# Altium PCB bug4.PcbDoc
Units mil, origin at the board's own origin, x right, y up, seen from the top; angles counter-clockwise.
Board outline 2629.47 x 1866.47 mil, 4 copper layers (Top Layer, Mid-Layer 1, Mid-Layer 2, Bottom Layer); 101 components, 84 nets, 360 pads, 226 vias.
Unrouted connection lines stored in the file: 71.
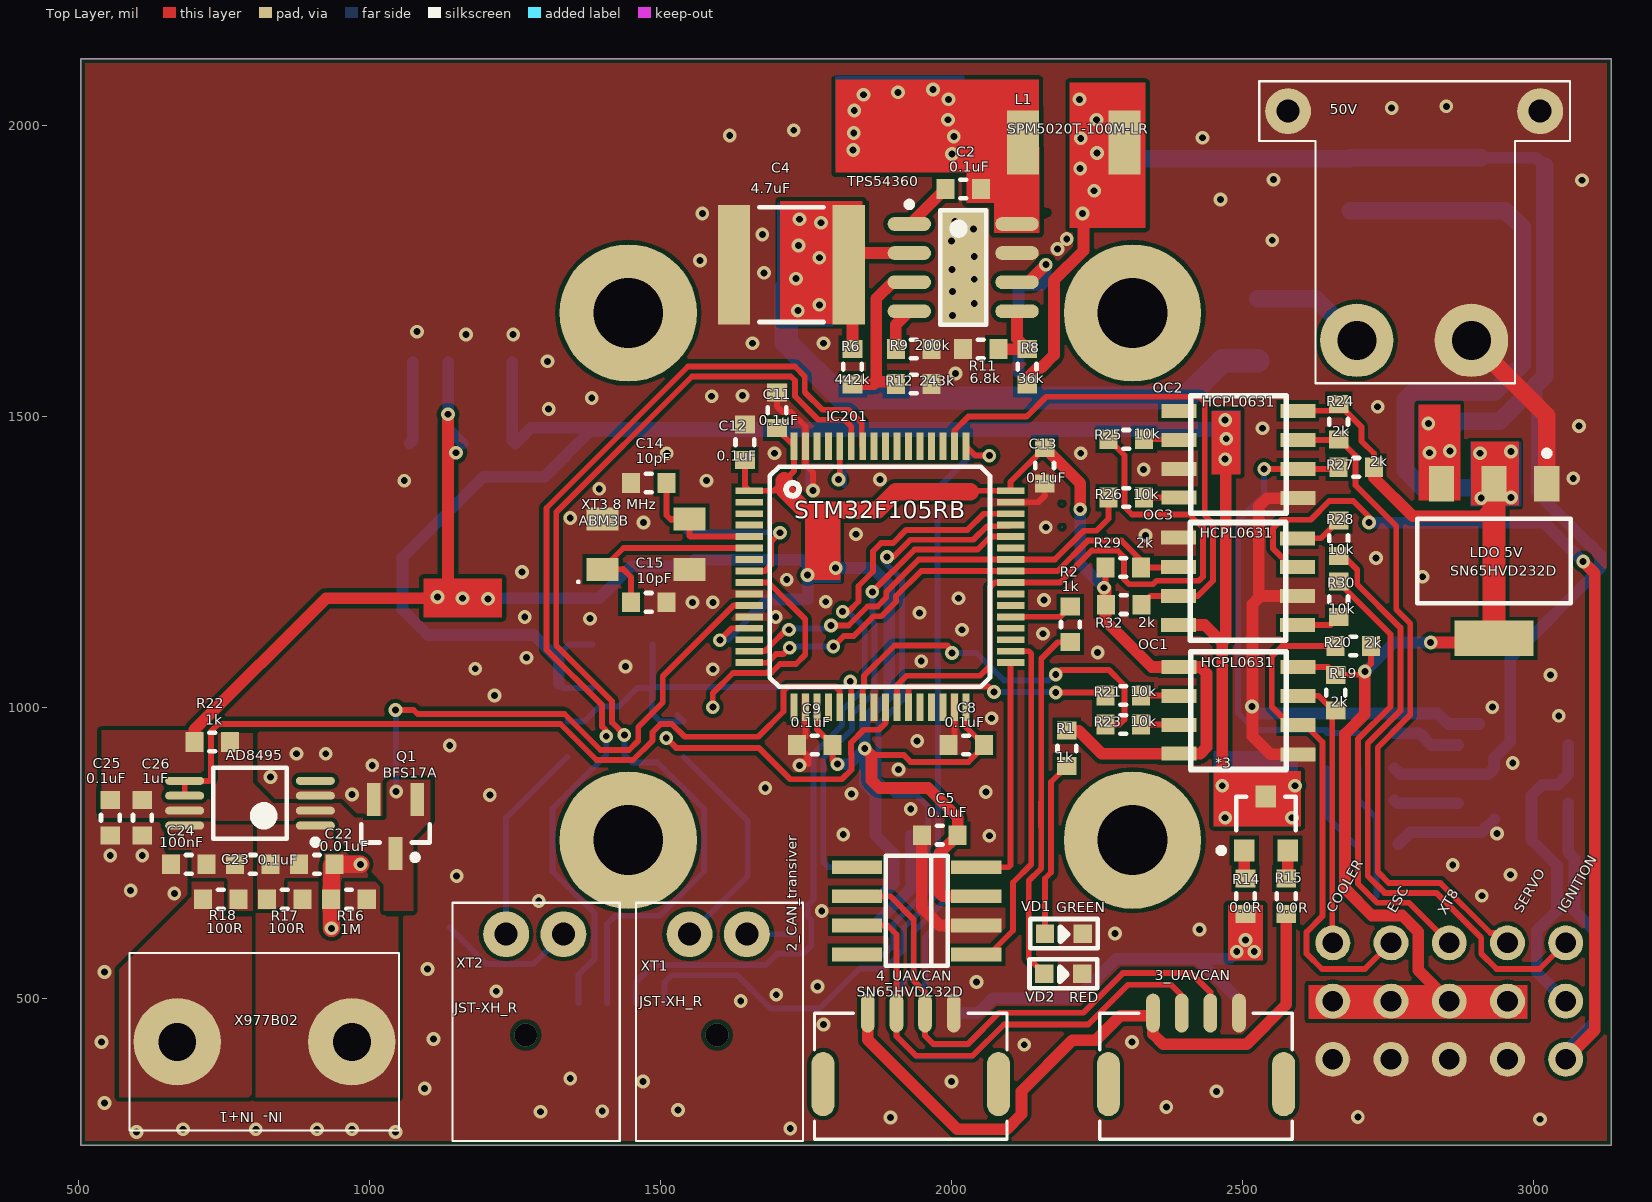
[diagram p0: Top Layer view]
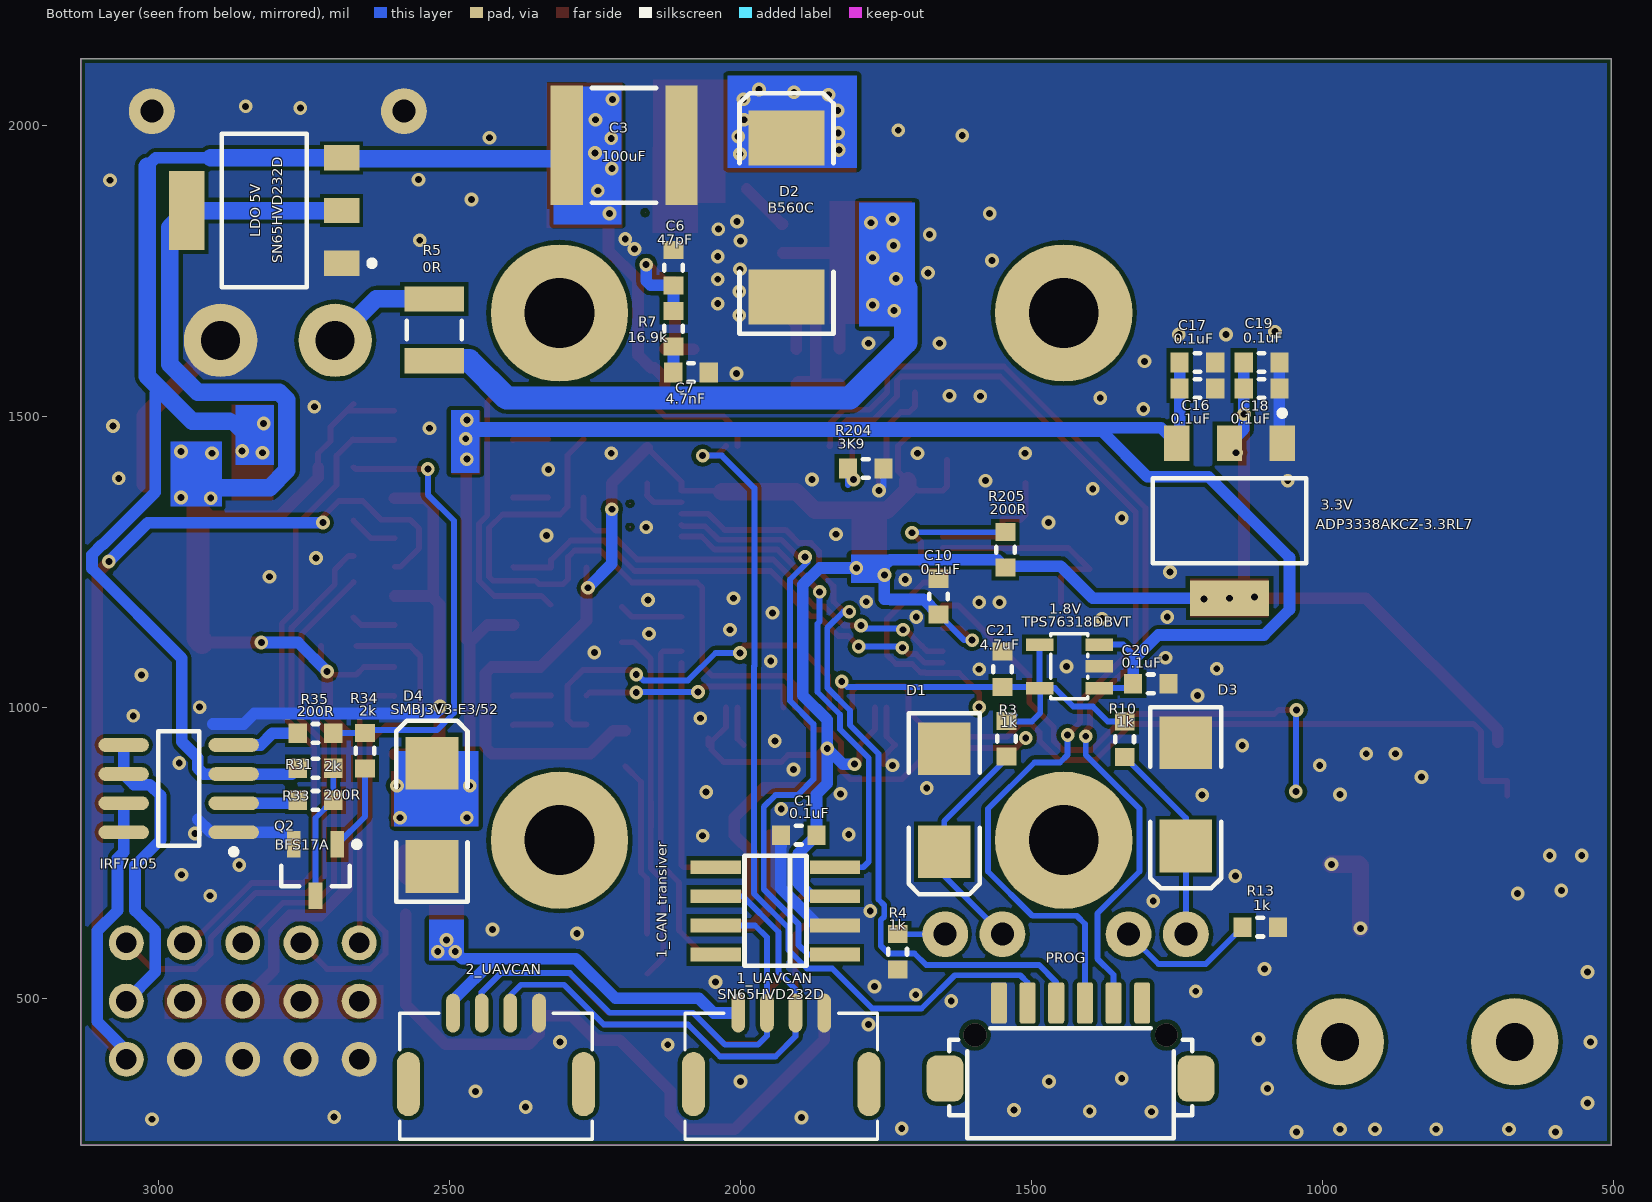
[diagram p1: Bottom Layer view, seen from below]
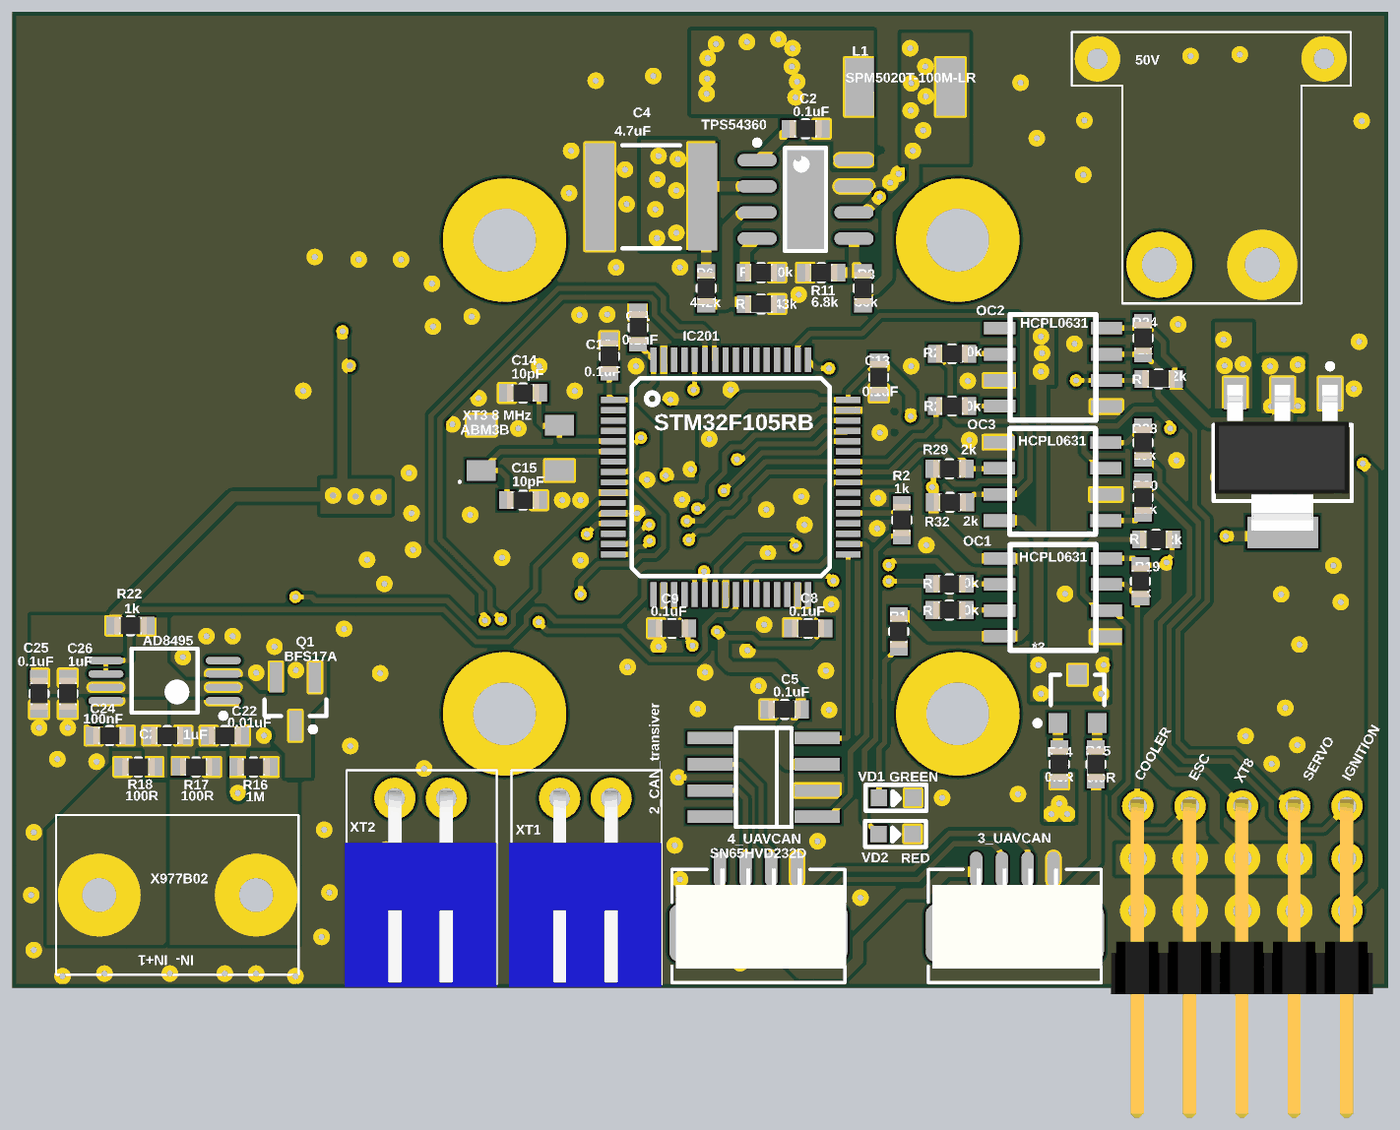
[diagram p2: 3D render of the assembled board from above, using the file's embedded part models]
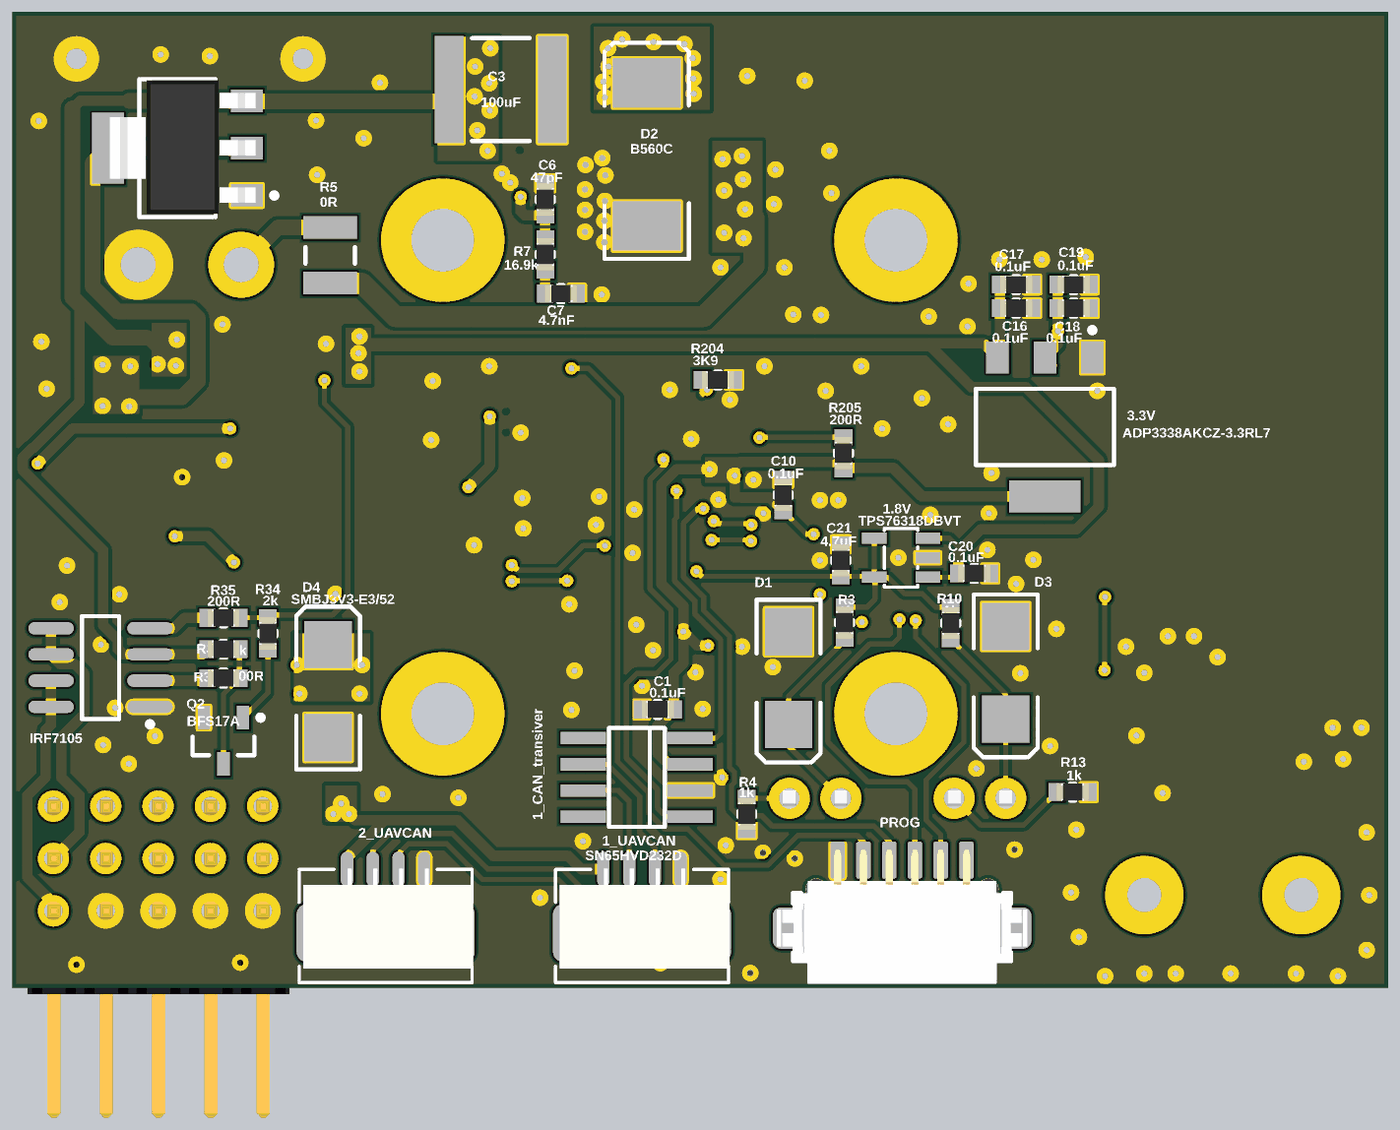
[diagram p3: 3D render of the assembled board from below, using the file's embedded part models]

## Layer stack, top to bottom
Top Solder: solder mask 0.4, Solder Resist, Dk 3.5
Top Layer: signal copper 1.4
Dielectric 1: dielectric 12.6, FR-4, Dk 4.8
Mid-Layer 1: signal copper 1.4
Dielectric2: dielectric 12.6, FR-4, Dk 4.8
Mid-Layer 2: signal copper 1.4
Dielectric3: dielectric 12.6, FR-4, Dk 4.8
Bottom Layer: signal copper 1.4
Bottom Solder: solder mask 0.4, Solder Resist, Dk 3.5

## Board outline
504.01,247.74 504.01,2114.21 3133.48,2114.21 3133.49,247.74

## Design rules (kind name [scope] priority, off if disabled: settings)
Clearance [All] p1: gap=7 ignorepadtopadclearanceinfootprint=FALSE
PlaneConnect [All] p1: planeconnectstyle=Direct reliefexpansion=20 reliefentries=4 reliefconductorwidth=10 reliefairgap=10
PolygonConnect [All] p1: connectstyle=Direct reliefconductorwidth=10 reliefentries=4 polygonreliefangle="90 Angle" airgapwidth=10
RoutingVias [All] p1: holewidth=28 width=50 viastyle="Through Hole" minholewidth=28 minwidth=50 maxholewidth=28 maxwidth=50
SMDToPlane [All] p1: distance=0
SolderMaskExpansion [All] p1: expansion=4
Width [All] p1: maxlimit=100 minlimit=10 preferedwidth=20
29 further rules are at their usual default settings.

## Components (designator, comment, footprint, x,y, rotation, side; value= is the part's Value field where it differs from the comment)
1.8V "TPS76318DBVT" SOT23-5L 1435,1070.22 r90 bottom
1_CAN_transiver "SN65HVD232D" SOIC8 1940,650.22 r0 bottom
1_UAVCAN "CON-4P-RA" JST_GH-4P-RA 1930,360.22 r0 bottom
2_CAN_transiver "SN65HVD232D" SOIC8 1940,650.22 r180 top
2_UAVCAN "CON-4P-RA" JST_GH-4P-RA 2420,360.22 r0 bottom
3.3V "ADP3338AKCZ-3.3RL7" ZZ311 1160,1320.22 r0 bottom
3_UAVCAN "CON-4P-RA" JST_GH-4P-RA 2420,360.22 r180 top
4_UAVCAN "CON-4P-RA" JST_GH-4P-RA 1930,360.22 r180 top
50V "Header 4" "HEADER 2 PW" 2696.15,1630.22 r0 top
*3 "BAT60A" sot-23 2540,800.22 r0 top
AD8495 "AD8495" PW008_N 795,835.22 r180 top
C1 "0.1uF" SMT0603/VISHAY 1900,780.22 r180 bottom value=100nF
C2 "0.1uF" SMT0603/VISHAY 2020,1890.22 r0 top value=100nF
C3 "100uF" 2220 2200,1965.22 r0 bottom value="47uF 25V"
C4 "2220" 2220 1725,1760.22 r0 top value="4.7uF 100v"
C5 "0.1uF" SMT0603/VISHAY 1980,780.22 r180 top value=100nF
C6 "47pF" SMT0603/VISHAY 2115,1755.22 r90 bottom value=100nF
C7 "4.7nF" SMT0603/VISHAY 2085,1575.22 r180 bottom value=100nF
C8 "0.1uF" SMT0603/VISHAY 2025,935.22 r0 top value=100nF
C9 "0.1uF" SMT0603/VISHAY 1765,935.22 r0 top value=100nF
C10 "0.1uF" SMT0603/VISHAY 1660,1190.22 r270 bottom value=100nF
C11 "0.1uF" SMT0603/VISHAY 1700,1510.22 r270 top value=100nF
C12 "0.1uF" SMT0603/VISHAY 1645,1455.22 r270 top value=100nF
C13 "0.1uF" SMT0603/VISHAY 2160,1415.22 r90 top value=100nF
C14 "10pF" SMT0603/VISHAY 1480,1385.22 r0 top value=100nF
C15 "10pF" SMT0603/VISHAY 1480,1180.22 r180 top value=100nF
C16 "0.1uF" SMT0603/VISHAY 1215,1547.35 r0 bottom value=100nF
C17 "0.1uF" SMT0603/VISHAY 1215,1592.35 r0 bottom value=100nF
C18 "0.1uF" SMT0603/VISHAY 1105,1547.35 r0 bottom value=100nF
C19 "0.1uF" SMT0603/VISHAY 1105,1592.35 r0 bottom value=100nF
C20 "0.1uF" SMT0603/VISHAY 1295,1040.22 r180 bottom value=100nF
C21 "4.7uF" SMT0603/VISHAY 1550,1065.22 r270 bottom value=100nF
C22 "0.01uF" SMT0603/VISHAY 910,730.22 r180 top value=100nF
C23 "0.1uF" SMT0603/VISHAY 800,730.22 r180 top value=100nF
C24 "100nF" SMT0603/VISHAY 690,730.22 r180 top
C25 "0.1uF" SMT0603/VISHAY 555,810.22 r270 top value=100nF
C26 "1uF" SMT0603/VISHAY 610,810.22 r270 top value=100nF
COOLER "PLT-3" PCBComponent_1 2655,595.22 r270 top
D1 "stb.3.3" SMB 1650,840.22 r270 bottom
D2 "B560C" SMC 1921,1841.22 r90 bottom
D3 "stb.3.3" SMB 1235,850.22 r270 bottom
D4 "SMBJ3V3-E3/52" SMB 2530,815.22 r90 bottom
ESC "PLT-3" PCBComponent_1 2755,595.22 r270 top
IC201 "STM32F105RB" TQFP64-10X10 1877,1224.22 r0 top
IGNITION "PLT-3" PCBComponent_1 3055,595.22 r270 top
"IN-  IN+1" "X977B02" X977B02 820,425.22 r0 top
IRF7105 "IRF7105" SO-8_N 2965,860.22 r0 bottom
L1 "SPM5020T-100M-LR" Inductor 2210,1970.22 r0 top
"LDO 5V" "SN65HVD232D" ZZ311 2818,1853.22 r90 bottom (schematic designator 5V_2)
"LDO 5V" "SN65HVD232D" ZZ311 2932,1251.22 r180 top (schematic designator 5V_1)
OC1 "HCPL0631" UCC37322P 2575,1095.22 r270 top
OC2 "HCPL0631" UCC37322P 2575,1535.22 r270 top
OC3 "HCPL0631" UCC37322P 2410,1115.22 r90 top
PROG "CONN HEADER SH 6POS SIDE 1MM TIN" "HIROSE DF13-6P-1.25H" 1433,358.22 r0 bottom
Q1 "BFS17A" SOT23_M 1045,795.22 r270 top
Q2 "BFS17A" SOT-23_N 2730,720.22 r270 bottom
R1 "1k" SMT0603/VISHAY 2198,929.22 r90 top
R2 "1k" SMT0603/VISHAY 2204,1142.22 r90 top
R3 "1k" SMT0603/VISHAY 1543,946.22 r270 bottom
R4 "1k" SMT0603/VISHAY 1730,580.22 r270 bottom
R5 "0R" 14-1210 2526,1648.22 r90 bottom
R6 "442k" SMT0603/VISHAY 1830,1585.22 r90 top
R7 "16.9k" SMT0603/VISHAY 2115,1650.22 r90 bottom
R8 "36k" SMT0603/VISHAY 2130,1585.22 r270 top
R9 "200k" SMT0603/VISHAY 1935,1615.22 r0 top
R10 "1k" SMT0603/VISHAY 1340,945.22 r270 bottom
R11 "6.8k" SMT0603/VISHAY 2050,1615.22 r0 top
R12 "243k" SMT0603/VISHAY 1935,1555.22 r180 top
R13 "1k" SMT0603/VISHAY 1107,622.22 r180 bottom
R14 "0.0R" SMT0603/VISHAY 2505,675.22 r90 top value=3K9
R15 "0.0R" SMT0603/VISHAY 2575,675.22 r90 top value=3K9
R16 "1M" SMT0603/VISHAY 965,670.22 r0 top
R17 "100R" SMT0603/VISHAY 855,670.22 r180 top
R18 "100R" SMT0603/VISHAY 745,670.22 r0 top
R19 "2k" SMT0603/VISHAY 2660,1025.22 r90 top value=2kR
R20 "2k" SMT0603/VISHAY 2690,1105.22 r0 top value=2kR
R21 "10k" SMT0603/VISHAY 2295,1020.22 r0 top
R22 "1k" SMT0603/VISHAY 730,940.22 r180 top
R23 "10k" SMT0603/VISHAY 2295,970.22 r0 top
R24 "2k" SMT0603/VISHAY 2665,1490.22 r90 top value=2kR
R25 "10k" SMT0603/VISHAY 2300,1460.22 r0 top
R26 "10k" SMT0603/VISHAY 2300,1360.22 r0 top
R27 "2k" SMT0603/VISHAY 2695,1412.22 r0 top value=2kR
R28 "10k" SMT0603/VISHAY 2665,1290.22 r270 top
R29 "2k" SMT0603/VISHAY 2295,1240.22 r0 top value=2kR
R30 "10k" SMT0603/VISHAY 2665,1185.22 r90 top
R31 "2k" SMT0603/VISHAY 2730,895.22 r0 bottom value=2kR
R32 "2k" SMT0603/VISHAY 2296,1176.22 r0 top value=2kR
R33 "200R" SMT0603/VISHAY 2730,840.22 r180 bottom
R34 "2k" SMT0603/VISHAY 2645,925.22 r270 bottom value=2kR
R35 "200R" SMT0603/VISHAY 2730,955.22 r180 bottom
R204 "3K9" SMT0603/VISHAY 1785,1410.22 r0 bottom
R205 "200R" SMT0603/VISHAY 1545,1270.22 r270 bottom
SERVO "PLT-3" PCBComponent_1 2955,595.22 r270 top
TPS54360 "=Device" D8_L_G 2020,1755.22 r0 top
VD1 "GREEN" 1.6x0.8SMTLED/KINGBRIGHT 2193,611.22 r0 top
VD2 "RED" 1.6x0.8SMTLED/KINGBRIGHT 2192,542.22 r0 top
XT1 "JST-XH_R" JST-XH-2R 1550,610.22 r0 top
XT2 "JST-XH_R" JST-XH-2R 1235,610.22 r0 top
"XT3 8 MHz" "ABM3B" DFN220P320X110-4N 1475,1280.22 r0 top value="8 MHz" (schematic designator XT3)
XT8 "PLT-3" PCBComponent_1 2855,595.22 r270 top

## Footprints (in the part's own frame and the unit in brackets; to place one, negate y for a bottom-side part, rotate by r counter-clockwise, add the part's x,y. Pads: shape width x height; smd on the part's side, far side on the other; paste and mask are expansions set on the pad)
1.6x0.8SMTLED/KINGBRIGHT [mm]
  rect 0.8x0.8 smd: 1(-0.825,0) 2(0.825,0)
  silkscreen extent -1.47,-0.64 1.47,0.64, body extent -0.8,-0.4 0.8,0.4, height 0.7
14-1210 [mm] "Chip Resistor, Body 3.2x2.5mm, IPC High Density"
  rect 1.1x2.6 smd: 1(-1.35,0) 2(1.35,0)
  silkscreen extent -0.4,-1.2 0.4,1.2, body extent -1.68,-1.32 1.67,1.32, height 0.9
2220 [mm] "Chip Capacitor, Body 5.7x5.0mm, IPC High Density"
  rect 1.4x5.2 smd: 1(-2.5,0) 2(2.5,0)
  silkscreen extent -1.4,-2.5 1.4,2.5, body extent -2.95,-2.63 2.95,2.63, height 1.4
D8_L_G [mm] "SOIC, 8-Leads, Body 4.9x3.9mm, Pitch 1.27mm, IPC High Density"
  oval 1.9x0.6 smd: 1(-2.35,1.905) 2(-2.35,0.635) 3(-2.35,-0.635) 4(-2.35,-1.905) 5(2.35,-1.905) 6(2.35,-0.635) 7(2.35,0.635) 8(2.35,1.905)
  rect 1.9x5 smd: 9(0,0)
  silkscreen extent -2.47,-2.5 1,2.88, body extent -2,-2.5 2,2.5, height 1.75
DFN220P320X110-4N [mm] "DFN, 4-Leads, Body 5.00x3.20mm, Pitch 2.20mm, IPC Medium Density"
  rect 1.4x1 smd: 1(-1.9,-1.1) 3(1.9,1.1) G(-1.9,1.1) G(1.9,-1.1)
  silkscreen extent -3,-1.7 -2.9,-1.6, body extent -2.55,-1.65 2.55,1.65, height 1.1
"HEADER 2 PW" [mm]
  round 3.2 hole 1.7: 1(0,0) 2(5,0)
  round 2 hole 1: A(-3,10) A(8,10)
  silkscreen extent -4.25,-1.88 9.3,11.3
"HIROSE DF13-6P-1.25H" [mm] "DF13 Series 1.25mm pitch miniature crimping connector single row"
  rrect30% 0.7x1.8 smd: 1(-3.125,-3.4) 2(-1.875,-3.4) 3(-0.625,-3.4) 4(0.625,-3.4) 5(1.875,-3.4) 6(3.125,-3.4)
  rrect50% 1.6x2 smd: M(-5.475,-0.1) M(5.475,-0.1)
  silkscreen extent -5.3,-2.3 5.3,2.5, body extent -6.08,-3.9 6.07,2.6, height 3.59
Inductor [mil]
  rect 55x110 smd: 1(-87,0) 2(87,0)
  body extent -106,-100 106,101, height 78
JST-XH-2R [mm]
  round 2 hole 1: 1(0,0) 2(2.5,0)
  body extent -2.45,-9.14 4.95,0.38, height 5.95
JST_GH-4P-RA [mm]
  rrect100% 0.6x1.7 smd: 1(1.875,-2.91) 2(0.625,-2.91) 3(-0.625,-2.91) 4(-1.875,-2.91)
  rrect100% 1x2.8 smd: M$0(-3.825,0.19) M$1(3.825,0.19)
  silkscreen extent -4.2,-2.9 4.2,2.6, body extent -4.25,-2.94 4,1.91, height 4.35
PCBComponent_1 [mil]
  round 60 hole 35.5: 1(0,0) 2(100,0) 3(200,0)
  body extent -13,-51 595,49, height 300
PW008_N [mm] "SOP, 8-Leads, Body 3x4.4mm, Pitch 0.65mm, IPC Medium Density"
  oval 1.7x0.35 smd: 1(-2.85,0.975) 2(-2.85,0.325) 3(-2.85,-0.325) 4(-2.85,-0.975) 5(2.85,-0.975) 6(2.85,-0.325) 7(2.85,0.325) 8(2.85,0.975)
  silkscreen extent -2.98,-1.55 1.6,1.82, body extent -2.25,-1.55 2.25,1.55, height 3.1
SMB [mm] "DO-214-AA/SMB; 2 C-Bend Leads; Body 5.3 x 3.6 mm, inc. leads (LxW)"
  rect 2.3x2.3 smd: 1(-2.25,0) 2(2.25,0)
  silkscreen extent -3.8,-1.55 4.1,1.55
SMC [mm] "DO-214-AB/SMC; 2 C-Bend Leads; Body 7.9 x 5.9 mm, inc. leads (LxW)"
  rect 2.4x3.3 smd: 1(-3.475,0) 2(3.475,0)
  silkscreen extent -5.08,-2.05 5.42,2.06
SMT0603/VISHAY [mm]
  rect 0.787x0.864 smd: 1(-0.775,0) 2(0.775,0)
  silkscreen extent -0.13,-0.41 0.13,0.41, body extent -0.78,-0.43 0.78,0.43, height 0.45
SO-8_N [mm] "8-Pin Small Outline Integrated Circuit 1.27 mm Pitch, IPC Medium Density"
  oval 2.2x0.6 smd: 1(-2.4,1.905) 2(-2.4,0.635) 3(-2.4,-0.635) 4(-2.4,-1.905) 5(2.4,-1.905) 6(2.4,-0.635) 7(2.4,0.635) 8(2.4,1.905)
  silkscreen extent -2.52,-2.5 0.9,2.88, body extent -1.95,-2.45 1.95,2.45, height 1.75
SOIC8 [mil]
  rect 86.61x23.62 smd: 1(-102.36,75) 2(-102.36,25) 3(-102.36,-25) 4(-102.36,-75) 5(102.36,-75) 6(102.36,-25) 7(102.36,25) 8(102.36,75)
  silkscreen extent -53,-94 53,94, body extent -79,-98 79,98, height 69
SOT23-5L [mil]
  rect 21.65x47.24 smd: 1(-37.4,-51.18) 2(0,-51.18) 3(37.4,-51.18) 4(37.4,51.18) 5(-37.4,51.18)
  silkscreen extent -56,-32 56,32
SOT23_M [mm] "SOT23, 3-Leads, Body 2.9x1.3mm, Pitch 0.95mm, Lead Span 2.3mm - Reverse Pinning, IPC Low Density"
  rect 1.45x0.6 smd: 1(1.175,0) 2(-1.175,-0.95) 3(-1.175,0.95)
  silkscreen extent -0.1,-1.5 1.47,1.5, body extent -0.7,-1.5 0.7,1.5, height 1.1
sot-23 [mm] "SOT-23; 3 Leads; Body 3.1 x 2.5 mm, inc. leads (LxW max)"
  rect 0.9x0.95 smd: 1(-0.95,-1.175) 2(0.95,-1.175) 3(0,1.175)
  silkscreen extent -2.07,-1.3 1.3,1.18
SOT-23_N [mm] "SOT23, 3-Leads, Body 2.9x1.3mm, Pitch 0.95mm, Lead Span 2.3mm, IPC Medium Density"
  rect 1.15x0.6 smd: 1(-1.125,0.95) 2(-1.125,-0.95) 3(1.125,0)
  silkscreen extent -1.25,-1.5 0.7,1.92, body extent -0.7,-1.5 0.7,1.5, height 1.11
TQFP64-10X10 [mm]
  rect 1.2x0.3 smd: 1(-5.7,3.75) 2(-5.7,3.25) 3(-5.7,2.75) 4(-5.7,2.25) 5(-5.7,1.75) 6(-5.7,1.25) 7(-5.7,0.75) 8(-5.7,0.25) 9(-5.7,-0.25) 10(-5.7,-0.75) 11(-5.7,-1.25) 12(-5.7,-1.75) 13(-5.7,-2.25) 14(-5.7,-2.75) 15(-5.7,-3.25) 16(-5.7,-3.75) 33(5.7,-3.75) 34(5.7,-3.25) 35(5.7,-2.75) 36(5.7,-2.25) 37(5.7,-1.75) 38(5.7,-1.25) 39(5.7,-0.75) 40(5.7,-0.25) 41(5.7,0.25) 42(5.7,0.75) 43(5.7,1.25) 44(5.7,1.75) 45(5.7,2.25) 46(5.7,2.75) 47(5.7,3.25) 48(5.7,3.75)
  rect 0.3x1.2 smd: 17(-3.75,-5.7) 18(-3.25,-5.7) 19(-2.75,-5.7) 20(-2.25,-5.7) 21(-1.75,-5.7) 22(-1.25,-5.7) 23(-0.75,-5.7) 24(-0.25,-5.7) 25(0.25,-5.7) 26(0.75,-5.7) 27(1.25,-5.7) 28(1.75,-5.7) 29(2.25,-5.7) 30(2.75,-5.7) 31(3.25,-5.7) 32(3.75,-5.7) 49(3.75,5.7) 50(3.25,5.7) 51(2.75,5.7) 52(2.25,5.7) 53(1.75,5.7) 54(1.25,5.7) 55(0.75,5.7) 56(0.25,5.7) 57(-0.25,5.7) 58(-0.75,5.7) 59(-1.25,5.7) 60(-1.75,5.7) 61(-2.25,5.7) 62(-2.75,5.7) 63(-3.25,5.7) 64(-3.75,5.7)
  silkscreen extent -4.8,-4.8 4.8,4.8, body extent -5,-5 5,5, height 1.6
UCC37322P [mil]
  rect 24x60 smd: 1(26,-184) 2(76,-184) 3(126,-184) 4(175,-184) 5(176,20) 6(126,20) 7(76,20) 8(26,20)
  silkscreen extent 0,-164 202,0, body extent 0,-164 202,0, height 143
X977B02 [mil]
  round 150 hole 65: 1(-150,0) 2(150,0)
  body extent -305,-175 305,175, height 373
ZZ311 [mm] "SOT-223/SC-73; 4 Leads; Body 6.7 x 7.3 mm, inc. leads (LxW max)"
  rect 1.1x1.55 smd: 1(-2.3,-3.375) 2(0,-3.375) 3(2.3,-3.375)
  rect 3.45x1.55 smd: 4(0,3.375)
  silkscreen extent -3.35,-4.82 3.35,1.85

## Part data
1.8V: library part LP5907MFX-3.3/NOPB, "IC REG LDO 3.3V 0.25A SOT23-5", Current - Limit (Min)=-, Current - Output=250mA, Manufacturer="Texas Instruments", Operating Temperature="-40°C ~ 125°C", Package / Case="SC-74A, SOT-753", Supplier Device Package=SOT-23, Supplier Part Number 1=296-38557-1-ND, Voltage - Input="Up to 5.5V", Voltage - Output=3.3V, Category="Integrated Circuits (ICs)", ComponentLink1Description=http://www.ti.com/lit/ds/symlink/lp5907.pdf, ComponentLink1URL=http://www.ti.com/lit/ds/symlink/lp5907.pdf, Mounting Type="Surface Mount", Packaging="Cut Tape (CT)", Part Status=Active, Pricing 1="1=0.57, 10=0.487, 100=0.3634, 500=0.28552, 1000=0.22063 (USD)", Regulator Topology="Positive Fixed", RoHS="RoHS Compliant", Stock 1=39845, Supplier 1=Digi-Key, Voltage - Dropout (Typical)=-
1_CAN_transiver 2_CAN_transiver: "IC CAN TRANSCEIVER 3.3V 8-SOIC", DIGIKEY#=296-26344-1-ND, MANF="Texas Instruments", MANF#=SN65HVD232DR, SN65HVD232=SN65HVD232
1_UAVCAN 2_UAVCAN 3_UAVCAN 4_UAVCAN: "Connector Receptacle 4 Position 0.049\" (1.25mm) Tin Surface Mount, Right Angle", DIGIKEY#=WM4948CT-ND, MANF=Molex, MANF#=5023860470
3.3V "LDO 5V" "LDO 5V": library part REG1117-5, "800mA and 1A Low Dropout Positive Regulator 2.85V, 3.3V, 5V, and Adjustable", ComponentLink1Description="Manufacturer Link", ComponentLink1URL=http://www.ti.com/, ComponentLink2Description=Datasheet, ComponentLink2URL=http://www-s.ti.com/sc/ds/REG1117.pdf, DatasheetVersion=Sep-1997, LatestRevisionDate=17-Jul-2002, LatestRevisionNote="Re-released for DXP Platform.", PackageDescription="SOT-223/SC-73; 4 Leads; Body 6.7 x 7.3 mm, inc. leads (LxW max)", PackageReference=ZZ311, PackageVersion=revC, Published=8-Jun-2000, Publisher="Altium Limited"
50V: library part XT30PW, ComponentLink1Description=AliExpress, ComponentLink1URL=https://ru.aliexpress.com/item/4000070113352.html?spm=a2g0o.productlist.0.0.39dd34bfyYuspa&algo_pvid=4d7d83f5-6270-4220-b100-9b5f13b0846d&algo_expid=4d7d83f5-6270-4220-b100-9b5f13b0846d-3&btsid=c67bc929-e3be-4af3-9fd9-25ac13ce4818&ws_ab_test=searchweb0_0,searchweb201602_,searchweb201603_55, Part Number=XT30PW
*3: library part BAT54_C
C1 C2 C5 C6 C7 C8 C9 C10 C11 C12 C13 C14 C15 C16 C17 C18 C19 C20 C21 C22 C23 C24 C25 C26: library part "Cap Semi", "Capacitor (Semiconductor SIM Model)", LatestRevisionDate=29-May-2009, LatestRevisionNote="IPC-7351 Footprint Added.", PackageDescription="Chip Capacitor", PackageReference=C1206, Published=8-Jun-2000, Publisher="Altium Limited"
C3: library part "Cap Semi", LatestRevisionDate=29-May-2009, LatestRevisionNote="IPC-7351 Footprint Added.", PackageDescription="Chip Capacitor", PackageReference=C1206, Published=8-Jun-2000, Publisher="Altium Limited"
C4: library part "Cap Semi", "4.7uF 100v", LatestRevisionDate=29-May-2009, LatestRevisionNote="IPC-7351 Footprint Added.", PackageDescription="Chip Capacitor", PackageReference=C2220, Published=8-Jun-2000, Publisher="Altium Limited"
D1 D3 D4: library part Diode, "Default Diode", Code_JEDEC=DO-214-AB, LatestRevisionDate=17-Jul-2002, LatestRevisionNote="Re-released for DXP Platform.", PackageDescription="DO-214-AB/SMC; 2 C-Bend Leads; Body 7.9 x 5.9 mm, inc. leads (LxW)", PackageReference=SMC, PackageVersion=Sep-1996, Published=8-Jun-2000, Publisher="Altium Limited"
D2: "60V 0.5A Shottcky Diode"
IC201: library part STM32F105, "MCU ARM 256KB FLASH MEM 64-LQFP", OPERATING_TEMP="-40°C ~ 105°C (TA)", DIGIKEY#=497-8918-ND, MANF=STMicroelectronics, MANF#=STM32F105RCT6, STM32F105=STM32F105
IRF7105: library part Component_1
L1: library part L-EPCOS_B82464
OC1 OC2 OC3: "dual optocouplers"
PROG: library part DF13_6P_1, DIGIKEY#=455-1806-1-ND, MANF="JST Sales America Inc", MANF#=SM06B-SRSS-TB(LF)(SN)
Q1: library part BF547, "NPN 1 GHz Wideband Transistor", ComponentAvailability=Obsolete, ComponentLink1Description="Manufacturer Link", ComponentLink1URL=http://www.semiconductors.philips.com/, ComponentLink2Description=Datasheet, ComponentLink2URL=http://www.semiconductors.philips.com/acrobat/datasheets/BF547_3.pdf, ComponentLink3Description="Discontinuation Notice", ComponentLink3URL=http://www.semiconductors.philips.com/pip/old/BF547.html, DatasheetVersion=Sep-1995, LatestRevisionDate=12-Dec-2006, LatestRevisionNote="IPC-7351 Footprint Added.", PackageDescription="3-Pin SOT-23 Package 0.95 mm Pitch, 2.3 mm Lead Span", PackageReference=SOT23, PackageVersion=May-1999, Published=17-Sep-2003, Publisher="Altium Limited"
Q2: library part 2N3904, "NPN General Purpose Amplifier", ComponentLink1Description="Manufacturer Link", ComponentLink1URL=http://www.fairchildsemi.com/, ComponentLink2Description=Datasheet, ComponentLink2URL=http://www.fairchildsemi.com/ds/2N%2F2N3904.pdf, DatasheetVersion=1997, LatestRevisionDate=15-Jan-2003, LatestRevisionNote="PCB Footprint 'BCY-W3/D4.7' replaced", PackageDescription="TO, Flat Index; 3 In-Line, Axial Leads; Body Dia. 4.5mm; Leads 0.51 x 0.48 mm (max)", PackageReference=TO-92A, PackageVersion=Sep-1998, Published=8-Jun-2000, Publisher="Altium Limited"
R1 R2 R3 R4 R10 R13: library part CRCW060310K0FKEA/MURATA, "10k", PackageReference=0603
R5: library part Res3, "fuse", LatestRevisionDate=29-May-2009, LatestRevisionNote="IPC-7351 Footprint Added.", PackageDescription="Chip Resistor", PackageReference=J1-0603, Published=8-Jun-2000, Publisher="Altium Limited"
R6 R7 R8 R9 R11 R12 R16 R17 R18 R22: library part R0402
R14 R15 R204: library part 3K9-0402, PACKAGE=0402, TOLERANCE=1%, DIGIKEY#=311-3.90KLRCT-ND, MANF=Yageo, MANF#=RC0402FR-073K9L
R19 R20 R24 R27 R29 R31 R32 R33 R34 R35: library part Res3, "Resistor", LatestRevisionDate=29-May-2009, LatestRevisionNote="IPC-7351 Footprint Added.", PackageDescription="Chip Resistor", PackageReference=J1-0603, Published=8-Jun-2000, Publisher="Altium Limited"
R21 R23 R25 R26 R28 R30: library part CRCW060310K0FKEA/MURATA, PackageReference=0603
R205: library part 200R-0402, PACKAGE=0402, TOLERANCE=1%, ASSEMBLY=DNM, DIGIKEY#=311-200LRCT-ND, MANF=Yageo, MANF#=RC0402FR-07200RL
TPS54360: library part TPS54560, "150mA Low-Noise Low-Dropout Regulator Whit Shutdown"
VD1 VD2: library part KP-1608SRC-PRV/KINGBRIGHT, "Red 0603 LED", PackageReference=0603
XT1 XT2: library part TempXT_R
"XT3 8 MHz": library part ABM3B-8.000MHZ-10-1-U-T, "FA-238 16.0000MB-C3", Frequency Stability=±10ppm, Load Capacitance=10pF, Manufacturer="Abracon LLC", Operating Mode=Fundamental, Operating Temperature="-10°C ~ 60°C", Package / Case="4-SMD, No Lead", Ratings=-, Supplier Part Number 1=535-9721-1-ND, Category="Crystals, Oscillators, Resonators", ComponentLink1Description=http://www.abracon.com/Resonators/abm3b.pdf, ComponentLink1URL=http://www.abracon.com/Resonators/abm3b.pdf, Frequency Tolerance=±10ppm, Height - Seated (Max)="0.043\" (1.10mm)", Manufacturer Part Number=ABM3B-8.000MHZ-10-1-U-T, Mounting Type="Surface Mount", Packaging="Cut Tape (CT)", Part Status=Active, Pricing 1="1=0.69, 10=0.578, 50=0.5198, 100=0.462, 500=0.4389 (USD)", Pricing 2="1000=0.336, 3000=0.315, 5000=0.3045, 10000=0.294 (USD)", RoHS="RoHS Compliant", Size / Dimension="0.197\" L x 0.126\" W (5.00mm x 3.20mm)", Stock=35437, Supplier 1=Digi-Key, Supplier 2=Digi-Key, Supplier Part Number 2=535-9721-2-ND, Type="MHz Crystal"

## Free pads (board coordinates)
  round 236 hole 120: 10(1444.79,771.74) 11(1444.79,1677.26) 12(2310.93,1677.26) 13(2310.93,771.74)

## Via types
v1: diameter 23.62/0/23.62/23.62 (per signal layer), hole 11.81, Top Layer to Bottom Layer, 224 vias
v2: diameter 39.37, hole 39.37, Top Layer to Bottom Layer, tented both sides, 2 vias

## Nets (pads, with @x,y where several pads share a name; then routed paths per layer and width w, separated by ;. In a path a pad name is that pad's centre, name@x,y a point inside that pad or via, vN(x,y) a via of type N, cw(c..) or ccw(c..) an arc to the next point about the centre after c; other vN are vias at no path point)
BackupPWM: IC201.17
BOOT0: IC201.60 R204.2 | length 100.2
  Top Layer w10: v1(1806,1391.22) 1808.1,1393.32 IC201.60
  Bottom Layer w10: v1(1806,1391.22) 1815.51,1381.74 R204.2
CAN1_RX: 1_CAN_transiver.4 IC201.44 | length 840.2
  Top Layer w10: v1(1864,1198.22) 1936.53,1270.75 2044.53,1270.75 2066.9,1293.12 IC201.44
  Bottom Layer w10: 1_CAN_transiver.4 1789,725.22 1779.81,734.41 1779.81,913.03 1829,962.22 1829,987.45 1867.81,1026.26 1867.81,1143.45 1864,1147.27 v1(1864,1198.22)
CAN1_TX: 1_CAN_transiver.1 IC201.45 | length 1083.9
  Top Layer w10: v1(1889,1258.22) 1899.96,1258.22 1929.49,1287.75 2037.49,1287.75 2060.76,1311.03 2099.64,1311.03 IC201.45
  Bottom Layer w10: 1_CAN_transiver.1 1884,575.22 1900.61,591.83 1900.61,627.92 1960,687.31 1960,828.9 1939.86,849.03 1902.19,849.03 1874.81,876.41 1874.81,971.03 1914.81,1011.03 1914.81,1219.27 1884.86,1249.22 1889,1253.37 v1(1889,1258.22)
CAN2_RX: 2_CAN_transiver.4 IC201.33 | length 408.4
  Top Layer w10: 2_CAN_transiver.4 2098,725.22 2101.41,728.63 IC201.33
CAN2_TX: 2_CAN_transiver.1 IC201.34 | length 606.5
  Top Layer w10: 2_CAN_transiver.1 2064.45,575.22 2105.77,616.55 2105.77,699 2137.03,730.25 2137.03,786.97 2136.93,787.07 2136.93,843.82 2137.03,843.92 2137.03,1092.19 2132.95,1096.27 IC201.34
CoolerPWM: IC201.27 R21.1 | length 379.2
  Top Layer w10: IC201.27 1926.21,1033.65 1927.99,1035.43 2063.79,1035.43 v1(2073,1026.22) ; v1(2179,1025.22) 2259.49,1025.22 R21.1
  Bottom Layer w10: v1(2073,1026.22) 2178,1026.22 v1(2179,1025.22)
FuelSensor: IC201.50 OC3.7 R32.2 | length 936.8
  Top Layer w10: IC201.50 2004.95,1475.44 2028.73,1499.22 2128.76,1499.22 2162.76,1533.22 2425.97,1533.22 2435,1524.19 2435,1329.24 2449,1315.24 2449,1217.21 2423.01,1191.22 OC3.7 2342,1191.22 2341,1190.22 2340.51,1190.22 R32.2
GND: 1.8V.2 1_CAN_transiver.2 1_UAVCAN.4 2_CAN_transiver.2 2_UAVCAN.4 3.3V.1 3_UAVCAN.4 4_UAVCAN.4 50V.2 50V.A "LDO 5V.1" "XT3 8 MHz.G" AD8495.3 C1.1 C3.1 C4.1 C5.2 C6.2 C7.2 C8.1 C9.1 C10.1 C11.1 C12.1 C13.1 C14.1 C15.1 C16.1 C17.1 C18.1 C19.1 C20.2 C21.1 C22.1 C24.2 C25.2 C26.2 COOLER.3 D1.1 D2.1 D3.1 D4.1 ESC.3 IC201.10 IC201.12 IC201.18 IC201.24 IC201.31 IC201.47 IC201.63 IRF7105.1 OC1.5 OC2.3 OC2.5 OC3.2 OC3.5 PROG.6 Q1.2 Q2.2 R4.2 R9.2 R11.1 R12.1 R13.2 R16.1 R204.1 SERVO.3 TPS54360.7 TPS54360.9 VD1.2 VD2.2 XT8.3 | length 2799.6
  Top Layer w10: C11.1 1700,1517.22 1710.02,1507.2 1724.31,1507.2 1749.05,1482.47 IC201.63 1749.05,1416.17 1762,1403.22 v1(1762,1372.22) ; v1(1739,900.22) 1747.76,908.98 1754.51,902.22 1754.51,915.2 C9.1 1749.05,949.79 IC201.18 ; C8.1 2004.95,945.69 IC201.31 ; IC201.47 2148.95,1352.17 2161,1364.22 2160,1365.22 C13.1
  Top Layer w20: C5.2 1949.06,779.79 1949.06,656.52 1960,645.58 1960,645.22 1980,625.22 2_CAN_transiver.2 ; OC3.2 2531,1191.22 2528,1188.22 ; OC1.5 2548,919.22 2517,950.22 2517,1177.22 2528,1188.22 ; OC2.5 2542,1359.22 2528,1345.22 2528,1188.22
  Top Layer w30: v1(935,620.22) 935,727.66 937.56,730.22 v1(985,730.22) ; 50V.2 3022.55,1500.67 3022.55,1384.1
  Bottom Layer w10: R204.1 1754.49,1379.74 v1(1762,1372.22)
  Bottom Layer w20: 3.3V.1 1074.49,1458.14 C19.1 ; 1_CAN_transiver.2 1871.04,625.22 1878.61,632.79 1874.37,632.79 1930.94,689.37 1930.94,761.19 1930.51,761.63 C1.1 ; v1(2516,1001.22) 2516,997.24 2524.01,989.23 2834.99,989.23 2853,971.22 2906.75,971.22 ; Q2.2 2788.11,785.22 IRF7105.1 2910,785.22 2932,807.22
  other v1: 600,270.22 1045,270.22 680,275.22 805,275.22 910,275.22 970,275.22 1723,276.22 3011,292.22 1895,295.22 2698,296.22 1294,305.22 1400,306.22 1530,308.22 2369,313.22 545,320.22 2455,340.22 1095,345.22 1470,357.22 2000,357.22 1345,362.22 2125,420.22 540,425.22 2310,425.22 1110,430.22 1780,455.22 1638,495.22 1699,506.22 1218,512.22 1770,520.22 2043,528.22 545,545.22 1100,550.22 2281,611.22 2426,618.22 1777,650.22 1291,667.22 2911,676.22 665,680.22 590,685.22 1150,710.22 2960,712.22 2861,729.22 555,745.22 610,745.22 2065,779.22 1814,781.22 2937,783.22 1930,825.22 1207,849.22 970,850.22 1828,851.22 2059,854.22 1680,861.22 830,880.22 1909,893.22 1005,900.22 2964,904.22 875,920.22 925,920.22 1138,934.22 1941,942.22 2069,981.22 3043,985.22 2929,1000.22 1215,1020.22 3029,1055.22 1590,1065.22 1182,1066.22 1440,1070.22 1948,1079.22 1270,1085.22 2251,1094.22 2157,1126.22 2018,1133.22 1379,1152.22 1267,1155.22 1698,1155.22 1945,1162.22 1555,1180.22 1590,1180.22 1784,1181.22 2159,1184.22 2012,1187.22 1717,1219.22 2809,1224.22 1262,1232.22 2729,1256.22 2333,1295.22 1836,1297.22 2162,1309.22 1471,1317.22 1345,1325.22 1395,1375.22 1060,1389.22 1579,1389.22 1877,1391.22 3068,1393.22 2330,1408.22 1511,1436.22 1696,1436.22 2222,1436.22 2534,1479.22 3078,1483.22 1308,1512.22 2732,1516.22 1382,1531.22 1588,1534.22 1641,1535.22 2007,1573.22 1306,1594.22 1658,1625.22 1780,1625.22 1166,1640.22 1247,1640.22 1082,1645.22 2002,1673.22 2039,1693.22 2002,1714.22 2039,1735.22 1678,1746.22 2001,1752.22 1568,1767.22 2039,1774.22 2182,1787.22 2000,1801.22 2551,1802.22 2198,1804.22 1675,1812.22 2038,1821.22 2006,1834.22 1572,1848.22 2462,1872.22 3083,1905.22 2553,1906.22 2431,1978.22 1619,1982.22 1729,1991.22 2756,2029.22 2850,2032.22
GPIO_PMU_1: IC201.56
GPIO_PMU_2: IC201.57
I2C_SCL: IC201.61
I2C_SDA: IC201.62
IBAT: AD8495.2 IC201.11 Q1.1 Q1.3 R22.1 | length 919.7
  Top Layer w10: v1(1045,995.22) 1076,995.22 1083,988.22 1335.33,988.22 1397.14,926.41 1445.86,926.41 1461.81,942.36 1461.81,966.03 1504,1008.22 1504,1053.23 1625.78,1175.01 IC201.11
  Bottom Layer w10: v1(1045,995.22) 1046,994.22 v1(1046,855.22)
IGEN: AD8495.5 AD8495.6 IC201.21 | length 1395.5
  Top Layer w10: AD8495.6 AD8495.5 724.39,873.61 728,877.22 728,958.6 740.63,971.22 1328.28,971.22 1390.1,909.41 1452.9,909.41 1486.19,942.7 1486.19,957.09 1500.14,971.03 1519.86,971.03 1541.67,949.22 1668,949.22 1711.45,992.68 1711.45,1028.4 1718.48,1035.43 1800.71,1035.43 1808.1,1028.04 IC201.21
Ignition_on_boolean: IC201.15 IC201.42 R26.1 | length 770.5
  Top Layer w10: IC201.15 1679.41,1096.27 1688.21,1105.08 1718.68,1135.55 v1(1721,1133.22) v1@1725,1137.22 ; v1(1793,1140.22) 1815,1140.22 1815.19,1140.41 1822.86,1140.41 1855.67,1173.22 1872.67,1173.22 1887.81,1188.36 1887.81,1197.99 1943.57,1253.75 IC201.42 2177.49,1253.75 2226.97,1303.23 2249.01,1303.23 2269.49,1323.71 R26.1
  Bottom Layer w10: v1@1725,1137.22 v1@1723,1135.22 ; v1(1793,1140.22) 1788,1135.22 v1@1723,1135.22 ; v1@1723,1135.22 1719,1135.22 v1(1721,1133.22) v1@1723,1135.22
LED_R: IC201.37 R2.2 | length 109.8
  Top Layer w10: IC201.37 2186.59,1155.32 R2.2
Net1_CAN_transiver_6: 1_CAN_transiver.6 1_UAVCAN.3 2_UAVCAN.3 | length 917.3
  Bottom Layer w10: 1_CAN_transiver.6 1995.99,675.22 1934.61,613.84 1934.61,544.83 1905.39,515.61 1_UAVCAN.3 1905.39,434.83 1940,400.22 2035,400.22 2090,455.22 2235,455.22 2303.03,523.26 2376.97,523.26 2395.39,504.83 2_UAVCAN.3
Net1_CAN_transiver_7: 1_CAN_transiver.7 1_UAVCAN.2 2_UAVCAN.2 | length 862.1
  Bottom Layer w10: 1_CAN_transiver.7 1975,625.22 1954.61,604.83 1_UAVCAN.2 1954.61,435.61 1970,420.22 2026.72,420.22 2081.72,475.22 2225,475.22 2293.03,543.26 2411.97,543.26 2444.61,510.61 2_UAVCAN.2
Net2_CAN_transiver_6: 2_CAN_transiver.6 3_UAVCAN.3 4_UAVCAN.3 | length 922.7
  Top Layer w10: 2_CAN_transiver.6 1895,675.22 1935,635.22 1935,530.22 1955,510.22 1955,470.18 1954.61,469.79 1954.61,435.61 1968.89,421.33 2027.82,421.33 2081.72,475.22 2226.72,475.22 2294.75,543.26 2411.97,543.26 2444.61,510.61 3_UAVCAN.3 3_UAVCAN.3@2444.61,469.79
Net2_CAN_transiver_7: 2_CAN_transiver.7 3_UAVCAN.2 4_UAVCAN.2 | length 846.2
  Top Layer w10: 2_CAN_transiver.7 1890,625.22 1905.39,609.83 4_UAVCAN.2 1905.39,434.83 1938.89,401.33 2036.11,401.33 2090,455.22 2235,455.22 2303.03,523.26 2376.97,523.26 2395.39,504.83 3_UAVCAN.2 3_UAVCAN.2@2395.39,469.79
Net*3_1: *3.1 R14.2 | length 49.2
  Top Layer w20: *3.1 2502.6,708.14 R14.2
Net*3_2: *3.2 R15.2 | length 49.2
  Top Layer w20: R15.2 2577.4,708.14 *3.2
NetAD8495_1: AD8495.1 C22.2 C23.1 R17.2
NetAD8495_8: AD8495.8 C23.2 C24.1 R18.2
NetC2_1: C2.1 TPS54360.1 | length 86.9
  Top Layer w20: TPS54360.1 1929.49,1830.22 C2.1
NetC2_2: C2.2 D2.2 L1.1 TPS54360.8
  other v1: 2001,1950.22 1831,1957.22 2004,1980.22 1832,1986.22 1994,2009.22 1833,2025.22 1995,2044.22 1849,2052.22 1908,2056.22 1968,2061.22
NetC4_2: C4.2 R5.1 R6.2 TPS54360.2 | length 1308.4
  Top Layer w20: 1761,1774.22 1767,1780.22 1823.43,1780.22 TPS54360.2 ; C4.2 1830,1753.65 R6.2
  Bottom Layer w40: v1(1733,1736.22) 1716,1719.22 1716,1627.22 1812.01,1531.22 2401.99,1531.22 2465.85,1595.07 R5.1
  other v1: 1736,1681.22 1773,1691.22 1773,1772.22 1737,1793.22 1776,1832.22 1739,1838.22
NetC6_1: C6.1 R7.2 TPS54360.6 | length 184
  Top Layer w20: TPS54360.6 2132,1730.22 v1(2162,1760.22)
  Bottom Layer w20: R7.2 C6.1 2154.49,1724.71 2162,1732.22 v1(2162,1760.22)
NetC7_1: C7.1 R7.1 | length 44.7
  Bottom Layer w20: R7.1 2115,1575.74 C7.1
NetCOOLER_1: COOLER.1 OC1.7 R19.1 | length 480.7
  Top Layer w10: OC1.7 2595.49,1019.71 2630.51,1019.71 2654,996.22 2654,621.22 2667.5,607.72 COOLER.1
NetESC_1: ESC.1 OC1.6 R20.1 | length 865
  Top Layer w10: R20.1 2567.79,1105.22 2550,1087.44 2550,1001.01 2581.79,969.22 OC1.6 2608.21,969.22 2637,940.44 2637,640.86 2610,613.86 2610,576.58 2636.36,550.22 2710,550.22 ESC.1
NetIGNITION_1: IGNITION.1 R28.2 | length 1062.5
  Top Layer w10: R28.2 2673.52,1259.71 2697.01,1236.22 2697.01,1210.73 2771,1136.73 2771,994.02 2715,938.02 2715,710.22 2744,681.22 2832.64,681.22 2910,603.86 2910,576.58 2936.36,550.22 3010,550.22 IGNITION.1
NetIGNITION_2: IGNITION.2 IRF7105.5 IRF7105.6 | length 535.5
  Bottom Layer w20: IGNITION.2 3005,545.22 3005,615.93 3040,650.93 3040,728.23 2996.18,772.05 2996.18,848.4 3014.82,867.03 3042,867.03 3042,867.74 IRF7105.6 IRF7105.5
NetIGNITION_3: IGNITION.3 IRF7105.7 IRF7105.8 OC3.3 | length 2054.2
  Top Layer w10: OC3.3 2584.03,1241.22 2552,1273.25 2552,1307.19 2567.03,1322.22 2616.97,1322.22 2648.97,1354.22 2690,1354.22 2717,1327.22 v1(2717,1317.22)
  Top Layer w20: IGNITION.3 3105,445.22 3105,1230.22 v1(3085,1250.22)
  Bottom Layer w20: v1(2717,1317.22) 3018,1317.22 v1(3085,1250.22) ; IGNITION.3 3055,410.22 3105,460.22 3105,615.93 3070,650.93 3070,740.65 3059.49,751.17 IRF7105.8 IRF7105.7
"NetIN-  IN+1_1": "IN-  IN+1.1" R18.1
"NetIN-  IN+1_2": "IN-  IN+1.2" R16.2 R17.1
NetIRF7105_2: IRF7105.2 R33.1 | length 112.1
  Bottom Layer w20: R33.1 2765.51,835.22 IRF7105.2
NetIRF7105_4: IRF7105.4 R35.1 | length 118.3
  Bottom Layer w20: R35.1 2804,955.22 2824,935.22 IRF7105.4
NetOC1_2: OC1.2 R21.2 | length 65.9
  Top Layer w10: R21.2 2390,1020.22 OC1.2
NetOC1_3: OC1.3 R23.2 | length 65.9
  Top Layer w10: R23.2 2390,970.22 OC1.3
NetOC2_2: OC2.2 R25.2 | length 60.9
  Top Layer w10: R25.2 2390,1460.22 OC2.2
NetOC2_4: OC2.4 R26.2 | length 60.5
  Top Layer w10: R26.2 OC2.4
NetOC2_6: OC2.6 R27.1 R34.1 R35.2 | length 791.4
  Top Layer w10: v1(2537,1409.22) OC2.6 2661.49,1409.22 R27.1
  Bottom Layer w10: v1(2537,1409.22) 2537,1365.22 2492.19,1320.41 2492.19,989.94 2521.05,961.08 2645,961.08 R34.1 2698.98,955.74 R35.2
NetOC2_7: OC2.7 R24.1 SERVO.1 | length 1161.2
  Top Layer w10: OC2.7 2664.51,1459.22 R24.1 2666.47,1459.71 2694,1432.18 2694,1381.22 2764,1311.22 2764,1167.77 2788,1143.77 2788,986.98 2732,930.97 2732,717.27 2751.04,698.22 2839.68,698.22 2925.68,612.22 2938,612.22 SERVO.1
NetOC3_1: OC3.1 R30.1 | length 76.6
  Top Layer w10: OC3.1 2651.51,1141.22 R30.1
NetOC3_4: OC3.4 R28.1 | length 83.6
  Top Layer w10: OC3.4 2634.49,1290.22 R28.1
NetQ2_1: Q2.1 R34.2 | length 149.9
  Bottom Layer w10: R34.2 2645,812.11 Q2.1
NetQ2_3: Q2.3 R31.1 R33.2 | length 231.9
  Bottom Layer w10: R31.1 R33.2 2730,809.71 Q2.3
NetR1_1: R1.1 VD1.1 | length 303.1
  Top Layer w10: VD1.1 2160.52,705.66 2171.03,716.17 2171.03,801.05 2170.93,801.15 2170.93,829.73 2171.03,829.83 2171.03,871.74 R1.1
NetR2_1: R2.1 VD2.1 | length 622.8
  Top Layer w10: VD2.1 2132.77,568.97 2132.77,701.95 2154.03,723.21 2154.03,794.01 2153.93,794.11 2153.93,836.78 2154.03,836.88 2154.03,1083.25 2182.49,1111.71 R2.1
NetR4_1: R4.1 XT1.2 | length 81.8
  Bottom Layer w10: XT1.2 1729.49,610.22 R4.1
NetR6_1: R6.1 R12.2 TPS54360.3 | length 289.1
  Top Layer w20: R6.1 1866.49,1554.71 1871,1559.22 ; R12.2 1900.49,1559.22 1871,1559.22 ; TPS54360.3 1899,1730.22 1871,1702.22 1871,1559.22
NetR8_1: R8.1 R11.2 TPS54360.5 | length 121.4
  Top Layer w20: R11.2 2129.49,1615.22 R8.1 2112.52,1633.22 TPS54360.5
NetR9_1: R9.1 TPS54360.4 | length 74.5
  Top Layer w20: R9.1 1904.49,1657.23 TPS54360.4
NetR13_1: R13.1 XT2.2 | length 243.4
  Bottom Layer w10: R13.1 1200.88,558.85 1282.06,558.85 XT2.2
NetR30_2: R30.2 XT8.1 | length 777.8
  Top Layer w10: R30.2 2665,1214.45 2754,1125.45 2754,1001.06 2698,945.06 2698,697.22 2731,664.22 2786,664.22 XT8.1
NRST: IC201.7
OSC_IN_STM: "XT3 8 MHz.3" C14.2 IC201.5 | length 231.7
  Top Layer w10: C14.2 1510.51,1329.71 1519,1321.22 1521.31,1323.53 1549.8,1323.53 1549.8,1294.42 1551.1,1293.12 IC201.5
OVER_T: IC201.8 R205.1 | length 263.6
  Top Layer w10: IC201.8 1679.4,1234.06 1690,1244.67 1690,1284.35 v1(1705.44,1299.79)
  Bottom Layer w10: R205.1 1702.49,1300.74 v1@1704.44,1298.79
PB_3: IC201.55
PC_10: IC201.51
PC_11: IC201.52
PC_12: IC201.53
PD_2: IC201.54
PWM: IC201.14
Q0: "XT3 8 MHz.1" C15.2 IC201.6 | length 366
  Top Layer w10: C15.2 1449.49,1223.74 1436,1237.22 1435.69,1236.92 1400.2,1236.92 1436.71,1273.43 IC201.6
StrtPWM: IC201.23 R23.1 | length 684.4
  Top Layer w10: IC201.23 1847.47,1032.02 1849.81,1034.36 1849.81,1054.04 1902,1106.22 1993,1106.22 2007.16,1092.06 2001,1085.9 v1(2001,1093.22) ; v1(2179,1056.22) 2187,1064.22 2269.96,1064.22 2297,1037.18 2297,979.22 2288,970.22 R23.1
  Bottom Layer w10: v1(2001,1093.22) 2043,1093.22 2090,1046.22 2166.33,1046.22 2169.14,1049.04 2171.81,1049.04 v1(2179,1056.22)
SWCLK: IC201.49 PROG.5 | length 1493.6
  Top Layer w10: IC201.49 2041.05,1432.22 v1(2065,1432.22)
  Bottom Layer w10: PROG.5 1506.82,527.04 1519.29,539.52 1632.04,539.52 1689.14,482.41 1773.52,482.41 1842.52,551.41 1885.92,551.41 1917.61,583.11 1917.61,620.88 1977,680.27 1977,1070.55 1976.19,1071.36 1976.19,1376.41 2032,1432.22 v1(2065,1432.22)
SWDIO: IC201.46 PROG.4 | length 1395.7
  Top Layer w10: v1(1813,1164.22) 1822.63,1164.22 1840.19,1181.78 1840.19,1208.09 1865.19,1233.09 1865.19,1268.09 1879.14,1282.04 1898.86,1282.04 1899.3,1281.6 1922.45,1304.75 2027.53,1304.75 2055.27,1332.49 IC201.46
  Bottom Layer w10: PROG.4 1457.61,527.83 1487,557.22 1681.01,557.22 1701.01,577.22 1745.96,577.22 1759.01,590.27 1759.01,634.54 1753.19,640.36 1753.19,660.09 1762.81,669.71 1762.81,920.08 1812,969.27 1812,994.49 1850.81,1033.3 1850.81,1136.41 1823,1164.22 v1(1813,1164.22)
TachoInF: IC201.16 IC201.41 OC3.6 R29.2 | length 856.7
  Top Layer w10: IC201.16 1683.76,1076.58 1698.4,1091.22 1711,1091.22 v1(1722,1102.22) ; v1(1797,1104.22) 1815,1122.22 1832,1122.22 1866,1156.22 1879.72,1156.22 1904.81,1181.32 1904.81,1190.95 1948.08,1234.22 2182,1234.22 2234.01,1286.23 2291.99,1286.23 2325.51,1252.71 R29.2 2389,1240.22 OC3.6
  Bottom Layer w10: v1(1722,1102.22) 1724,1104.22 v1(1797,1104.22)
ThrottlePWM: IC201.26 IC201.40 R25.1 | length 1151.1
  Top Layer w10: IC201.26 1906.53,1038.01 1922.74,1054.22 2049,1054.22 2065.79,1071.01 2065.79,1205.57 2074.6,1214.38 IC201.40 2186.2,1214.38 2241.05,1269.23 2284.95,1269.23 2296,1258.18 2296,1220.27 2305.05,1211.22 2345.97,1211.22 2351.98,1217.22 2424.97,1217.22 2432,1224.25 2432,1308.19 2408.98,1331.22 2310.05,1331.22 2296.98,1344.28 2296.98,1432.73 R25.1
USART1_RX_inside: IC201.59 PROG.3 | length 1775.6
  Top Layer w10: v1(1438,952.22) 1438,952.9 1416.86,974.03 1416.86,1010.36 1321.19,1106.04 1321.19,1335.09 1554.33,1568.23 1724,1568.23 1731,1561.22 1731,1534.22 1771.21,1494.01 1816,1494.01 1827.79,1482.22 IC201.59
  Bottom Layer w10: PROG.3 1408.39,627.62 1422.52,641.74 1498.64,641.74 1574.79,717.9 1574.79,825.59 1495.15,905.22 1451,905.22 1438,918.22 v1(1438,952.22)
USART1_TX_inside: IC201.58 PROG.2 | length 1711.9
  Top Layer w10: v1(1407,950.22) 1407,959.86 1399.86,966.99 1399.86,1003.32 1304.19,1098.99 1304.19,1342.13 1547.29,1585.23 1731.04,1585.23 1748,1568.27 1748,1541.27 1778.25,1511.01 1823.04,1511.01 1845.69,1488.36 1845.69,1448.63 IC201.58
  Bottom Layer w10: PROG.2 1359.18,540.41 1387,568.22 1387,645.68 1314.79,717.9 1314.79,825.59 1407,917.8 v1(1407,950.22)
VBAT_SENSE: 1.8V.4 1.8V.5 C21.2 IC201.22 R3.1 R10.1 | length 753.8
  Top Layer w10: v1(1826,1044.22) 1827.79,1042.43 IC201.22
  Bottom Layer w10: R10.1 1369,975.74 1394.74,1001.48 1428.26,1001.48 1459.6,1032.82 1.8V.5 ; 1.8V.4 1.8V.5 ; R3.1@1529.09,986.64 1540,975.74 1499.49,975.74 1485,990.22 1485,1031.64 1.8V.5 ; v1(1826,1044.22) 1816.49,1034.71 C21.2 1488.07,1034.71 1.8V.5
VCC_3.3: 1_CAN_transiver.3 2_CAN_transiver.3 3.3V.2 3.3V.4 AD8495.7 C1.2 C5.1 C8.2 C9.2 C10.2 C11.2 C12.2 C13.2 C18.2 C19.2 C25.1 C26.1 IC201.1 IC201.13 IC201.19 IC201.32 IC201.48 IC201.64 OC1.1 OC1.4 R1.2 R22.2 R29.1 R32.1 R205.2 | length 5354.9
  Top Layer w10: v1(1602,1115.22) 1622.42,1135.64 IC201.13 ; C12.2 1645,1379.45 IC201.1 1695.64,1371.86 1712.5,1388.72 1729.36,1405.58 IC201.64 1700,1477.99 C11.2 ; IC201.19 1768.73,962.01 C9.2 1795.51,908.74 1802.02,902.22 v1(1804,902.22) ; 1862.5,917.72 1918.17,917.72 1929.68,906.22 2028.99,906.22 2049.74,926.96 C8.2@2049.74,941 ; IC201.32 2024.64,966.1 C8.2@2049.74,941 ; 2032,1370.22 2033.64,1371.86 IC201.48 2101.41,1387.15 C13.2 ; C8.2 2055.51,946.78 C8.2@2049.74,941 ; v1@2264.49,1205.22 R29.1
  Top Layer w20: R22.2 699.49,961.2 925.64,1187.35 v1(1160,1187.35) 1135,1212.35 v1(1135,1503.22) ; v1(1851,929.22) 1862.5,917.72 1862.5,874.72 1876,861.22 1960,861.22 2010.51,810.71 C5.1 1979.06,748.77 1979.06,681.17 1985,675.22 2_CAN_transiver.3 ; C13.2 2221,1384.74 v1(2221,1340.22) ; R1.2 2218.49,959.74 2232,946.23 2232,946.17 2257.95,920.22 OC1.4 2427,920.22 2438,931.22 2438,1058.22 2427,1069.22 OC1.1 2344,1069.22 2264.49,1148.74 v1@2264.49,1205.22
  Top Layer w30: 1712.5,1388.72 1712.5,1373.91 1748,1338.41 1872.47,1338.41 1904.28,1370.22 2032,1370.22
  Bottom Layer w10: v1(1602,1115.22) 1615.51,1115.22 C10.2
  Bottom Layer w20: C19.2 1135.51,1477.59 3.3V.2 ; v1(1160,1187.35) 1395.13,1187.35 1450,1242.22 1542.49,1242.22 R205.2 1558.52,1253.23 1743,1253.23 1752.81,1243.41 v1(1752.81,1227.04) 1752.81,1185.41 1742,1185.41 1741.81,1185.22 1685.51,1185.22 C10.2 ; v1(1801,1239.22) 1863.74,1239.22 1892.81,1210.16 1892.81,1020.15 1851,978.34 v1(1851,929.22) ; v1(1804,902.22) 1824,902.22 v1(1851,929.22) ; 1_CAN_transiver.3 1878.61,675.22 1900.94,697.56 1900.94,748.77 C1.2 1869.49,850.62 1851,869.11 v1(1851,929.22) ; v1(2221,1340.22) 2221,1246.22 v1(2262,1205.22)
  other v1: 1204,1186.22 1117,1189.22 1149,1437.22
VCC_50v: 50V.1 R5.2 | length 200.5
  Bottom Layer w30: R5.2 2625.85,1701.37 50V.1@2697,1630.22
VCC_CAN: 1.8V.1 1.8V.3 3.3V.3 *3.3 C16.2 C17.2 C20.1 D4.2 OC3.8 | length 4155
  Top Layer w20: OC3.8 2435,1141.22 2465,1111.22 ; v1(2465,865.22) 2465,1111.22 ; v1@2465,1469.22 2471,1463.22 2471,1117.22 2465,1111.22
  Bottom Layer w10: C20.1 1332.91,1032.82 1.8V.1 ; 1325.51,1081.22 1325.51,1090.74 1342.4,1107.62 1.8V.3
  Bottom Layer w20: C17.2 1245.51,1458.14 3.3V.3 1277.68,1480.22 2457,1480.22 v1(2470,1493.22) ; C20.1 1325.51,1081.22 1282.51,1124.22 1100.66,1124.22 1057,1167.88 1057,1257.22 1196,1396.22 1301,1396.22 1379,1474.22 2459,1474.22 v1(2472,1461.22)
  other v1: 2470,810.22 2585,810.22 2590,865.22 2470,1426.22
VCC_CAN1: 1_UAVCAN.1 2_UAVCAN.1 R14.1 | length 652.9
  Bottom Layer w20: 1_UAVCAN.1 2045.93,474.79 2071.36,500.22 2214.64,500.22 2282.68,568.26 2422.32,568.26 ; v1(2490,580.22) 2478.03,568.26 2422.32,568.26 ; 2_UAVCAN.1 2493.82,496.76 2422.32,568.26
  other v1: 2520,580.22 2505,600.22
VCC_CAN2: 3_UAVCAN.1 4_UAVCAN.1 R15.1 | length 1153.9
  Top Layer w20: 4_UAVCAN.1@1856.18,469.79 1856.18,429.04 2010,275.22 2094.63,275.22 2120.28,300.87 2120.28,340.5 2207.64,427.86 2247.64,427.86 2289.57,469.79 3_UAVCAN.1@2346.18,469.79 ; 3_UAVCAN.1 3_UAVCAN.1@2346.18,469.79 ; R15.1 2575,489.33 2507,421.33 2363.58,421.33 2346.18,438.73 3_UAVCAN.1@2346.18,469.79
VCC_servo: "LDO 5V.3" C3.2 IRF7105.3 L1.2 R8.2 R31.2 | length 2662.2
  Top Layer w20: R8.2 2130,1565.22 2148.03,1583.24 2154.05,1583.24 2175.93,1605.12 2175.93,1733.17 2226.81,1784.06 2226.81,1846.41 v1(2225,1848.22)
  Bottom Layer w20: R31.2 2770.51,885.22 IRF7105.3 2922,885.22 2932,895.22 2932,912.97 2960,940.97 2960,1084.48 3113.81,1238.29 3113.81,1262.16 3096.93,1279.04 3095.19,1279.04 3005,1369.22 3005,1539.22 2997.5,1546.72 ; 2844,1457.22 2878,1491.22 ; 2910,1943.78 3004.45,1943.78 3019,1929.22
  Bottom Layer w30: v1(2250,1952.22) 2257.09,1959.32 2274.18,1942.22 2685.13,1942.22 2685.13,1943.78 2910,1943.78 ; 2878,1491.22 2942,1491.22 2997.5,1546.72 3019,1568.22 3019,1929.22
  other v1: 2821,1437.22 2856,1440.22 2819,1487.22 2245,1887.22 2221,1925.22 2222,1977.22 2249,2009.22 2220,2044.22
VCC_servo_5: "LDO 5V.2" "LDO 5V.4" COOLER.2 ESC.2 OC1.8 OC2.8 R19.2 R20.2 R24.2 R27.2 SERVO.2 XT8.2 | length 2962.4
  Top Layer w10: OC1.8 2646.51,1069.22 R19.2 2701.51,1055.74 2720.51,1074.74 R20.2 ; OC2.8 R24.2@2676.51,1509.22 ; R24.2 R24.2@2676.51,1509.22 ; R27.2 2725.51,1435.71 2704,1457.22 2704,1481.74 R24.2@2676.51,1509.22
  Top Layer w20: v1(2710,1061.22) 2710,988.17 2676,954.17 2676,688.11 2721.89,642.22 2774.47,642.22 2802,614.69 2802,548.22 XT8.2 ; R27.2 2725.51,1394.71 2792,1328.22 2911,1328.22 2932,1349.22 2932,1384.1 ; v1(2823,1111.22) 2924.87,1111.22
  Top Layer w40: 2924.87,1111.22 2932,1118.35 2932,1349.22
  Bottom Layer w20: v1(2710,1061.22) 2760,1111.22 v1(2823,1111.22)
  Bottom Layer w30: 2685.13,1853.22 2950.87,1853.22 2980,1824.1 2980,1589 2932.22,1541.22 2791.89,1541.22 2779,1528.34 2779,1407.11 2808.89,1377.22 2919,1377.22 2919,1397.22 v1(2961,1439.22)
  other v1: 2910,1359.22 2961,1360.22 2908,1436.22
VTMP: D1.2 IC201.9 R3.2 XT1.1 | length 784.8
  Top Layer w10: v1(1590,1000.22) 1590,1024.22 1624.45,1058.68 1681.18,1058.68 1682.09,1059.58 1690.8,1059.58 1705.44,1074.22 1732.67,1074.22 1748.81,1090.36 1748.81,1151.09 1685.51,1214.38 IC201.9
  Bottom Layer w10: R3.2@1540,914.71 1650,804.71 D1.2 1650,710.22 XT1.1
VTMP2: D3.2 IC201.25 R10.2 XT2.1 | length 849.5
  Top Layer w10: v1(1510,947.22) 1527,930.22 1669,930.22 1723,876.22 1811.67,876.22 1828,892.55 1828,918.55 1827.19,919.36 1827.19,939.09 1849.33,961.22 1875.07,961.22 1886.84,973 IC201.25
  Bottom Layer w10: XT2.1 D3.2 1235,809.71 R10.2
pads on no net: 1_CAN_transiver.5 1_CAN_transiver.8 1_UAVCAN.M$0 1_UAVCAN.M$1 2_CAN_transiver.5 2_CAN_transiver.8 2_UAVCAN.M$0 2_UAVCAN.M$1 3_UAVCAN.M$0 3_UAVCAN.M$1 4_UAVCAN.M$0 4_UAVCAN.M$1 AD8495.4 IC201.2 IC201.3 IC201.4 IC201.20 IC201.28 IC201.29 IC201.30 IC201.35 IC201.36 IC201.38 IC201.39 IC201.43 OC2.1 PROG.1 PROG.M
copper on no net:
  other v2: 1268.63,436.96 1597.37,436.96

## Polygon pours and split planes (outlines as drawn)
GND on Top Layer "Top Layer-No Net" (solid, pour order 42): 3134,254.22 3133,253.22 504,253.22 504,2115.22 3134,2115.22
IBAT on Top Layer "Top Layer-No Net" (solid, pour order 30): 950,835.22 975,810.22 1030,810.22 1030,870.22 1035,875.22 1105,875.22 1105,805.22 1075,775.22 1075,650.22 1025,650.22 1025,695.22 945,775.22 945,805.22 728,805.22 728,955.22 800,955.22 800,870.22 835,835.22
VCC_3.3 on Top Layer "Top Layer-No Net" (solid, pour order 28): 727,810.22 540,810.22 540,960.22 727,960.22
NetAD8495_1 on Top Layer "Top Layer-No Net" (solid, pour order 38): 805,805.22 805,650.22 860,650.22 860,700.22 915,700.22 915,755.22 945,755.22 945,805.22
NetAD8495_8 on Top Layer "Top Layer-No Net" (solid, pour order 36): 800,650.22 750,650.22 750,700.22 695,700.22 695,755.22 655,755.22 655,805.22 800,805.22
"NetIN-  IN+1_1" on Top Layer "Top Layer-No Net" (solid, pour order 34): 750,700.22 695,700.22 695,675.22 680,660.22 570,550.22 570,330.22 800,330.22 800,640.22 750,640.22
"NetIN-  IN+1_2" on Top Layer "Top Layer-No Net" (solid, pour order 32): 860,700.22 860,650.22 805,650.22 805,330.22 1050,330.22 1050,640.22 1030,640.22 1025,645.22 1025,700.22 958,700.22 958,640.22 920,640.22 920,700.22
no net on Top Layer "Top Layer-No Net" (solid, pour order 12): 11720,946.01
GND on Bottom Layer "Top Layer-No Net" (solid, pour order 40): 3134,248.22 3133,247.22 504,247.22 504,2115.22 3134,2115.22
no net on Bottom Layer "Top Layer-No Net" (solid, pour order 22): 1925,2400.22
no net on Bottom Layer "Top Layer-No Net" (solid, pour order 20): 9620,4660
no net on Bottom Layer "Top Layer-No Net" (solid, pour order 18): 3220,1625.22

## Keep-outs
Keep-Out Layer:
  lines w1: 2189.5,1310 ccw(c2190,1310) 2190,1309.5 ; 2189.5,1350 ccw(c2190,1350) 2190,1349.5 ; 504.01,247.74 504.01,2114.21 3133.48,2114.21 3133.49,247.74 504.01,247.74 ; 2163.5,1849.22 cw(c2164,1849.22) 2164,1849.72 ccw(c2164,1849.22) 2163.5,1849.22

## Other copper
Top Layer:
  rectangle net VCC_3.3: 1093,1154.22 1228,1221.22
  rectangle net VCC_servo: 2203,1823.22 2333,2073.22
  rectangle net NetC2_2: 2026,1866.22 2105,1942.22
  rectangle net NetC2_2: 2073,1814.22 2151,1962.22
  rectangle net NetC2_2: 1801,1918.22 2150,2078.22
  rectangle net VCC_3.3: 1748,1218.22 1809,1332.22
  rectangle net NetC4_2: 1705,1658.22 1847,1869.22
  rectangle net VCC_servo_5: 2892,1346.22 2975,1456.22
  rectangle net VCC_servo: 2802,1355.22 2874,1520.22
  rectangle net VCC_servo_5: 2613,464.22 2989,523.22
  rectangle net VCC_CAN: 2447,1400.22 2496,1509.22
  rectangle net VCC_CAN: 2450,795.22 2600,890.22
  rectangle net VCC_CAN1: 2475,565.22 2535,660.22
Bottom Layer:
  rectangle net VCC_servo: 2204,1829.22 2321,2066.22
  rectangle net NetC2_2: 1800,1926.22 2022,2085.22
  rectangle net VCC_3.3: 1746,1213.22 1810,1262.22
  rectangle net NetC4_2: 1700,1654.22 1796,1867.22
  rectangle net VCC_servo_5: 2891,1345.22 2979,1456.22
  rectangle net VCC_servo: 2801,1416.22 2867,1519.22
  rectangle net VCC_CAN: 2448,1402.22 2497,1510.22
  rectangle net VCC_CAN: 2450,795.22 2595,925.22
  rectangle net VCC_CAN1: 2475,565.22 2535,635.22

## Silkscreen, mask and mechanical layers (free items; w line width, h text height)
Top Overlay:
  lines w3.94: 588,273 588,578 888,578 1051,578 1051,273 588,273 ; 1143,255 1143,664 1157,664 1430,664 1430,255 1143,255 ; 1458,255 1745,255 1745,664 1472,664 1458,664 1458,255
  text "4.7uF" at 1655,1877.22 h30
Mechanical 2:
  lines w3.94: 2504,784 2537,805 ; 2570,783 2537,805 ; 2635.42,824.01 2537,805
  lines w5: 2160,1461 2212.37,1513.37 2365.24,1513.37 2389,1508.22
  lines w10: 1234,871.22 1234,905.22 1249,920.22 1438,920.22 1483,920.22 1510,947.22 ; 1235,610.22 1235,719.22 ; 1550,610.22 1622,682.22 1622,715.22 ; 1590,1000.22 1621,969.22 1621,901.22 1621,867.22 ; 1206.5,719.22 1206.5,871.22 1261.5,871.22 1261.5,719.22 1236.5,719.22 1206.5,719.22 ; 1593.5,715.22 1623.5,715.22 1648.5,715.22 1648.5,867.22 1593.5,867.22 1593.5,715.22
  text "Connect" at 2198,1521.22 h20
  text "2 Diodes BAT60A" at 2646,828 h20
  text "Line is on the up side" at 2623,798 h20
  text "50k" at 1148,783.22 h20
  text "50k" at 1658,777.22 h20
Mechanical 14:
  lines w3.94: 1238,858 1080,789 1650,852.5 ; 1399.14,976.03 1162,1046 1538,1032 1561,1022 1570,1000 1573,949
  lines w10: 1207.91,827.42 1269.91,890.42 ; 1209.91,889.42 1268.91,823.42 ; 1340,914.71 1370.49,914.71 1383.19,927.41 1383.19,960.09 1399.14,976.03 1447.86,976.03 1476.67,947.22 1510,947.22 ; 1540,914.71 1590,964.71 1590,1000.22 ; 1619,821 1681,884 ; 1621,883 1680,817
  text "Cut Tracks" at 1149,1051 h20
  text "Don't Solder Diodes" at 1074,780 h20